# Altium PCB PB2_AdapterBoard_Rev0.PcbDoc
Units mil, origin at the board's own origin, x right, y up, seen from the top; angles counter-clockwise.
Board outline 945.02 x 1811.12 mil, 6 copper layers (Top Layer, Internal Plane 1, Signal Layer 1, Signal Layer 2, Internal Plane 2, Bottom Layer), stack 48.468 mil thick; 8 components, 17 nets, 91 pads, 88 vias.
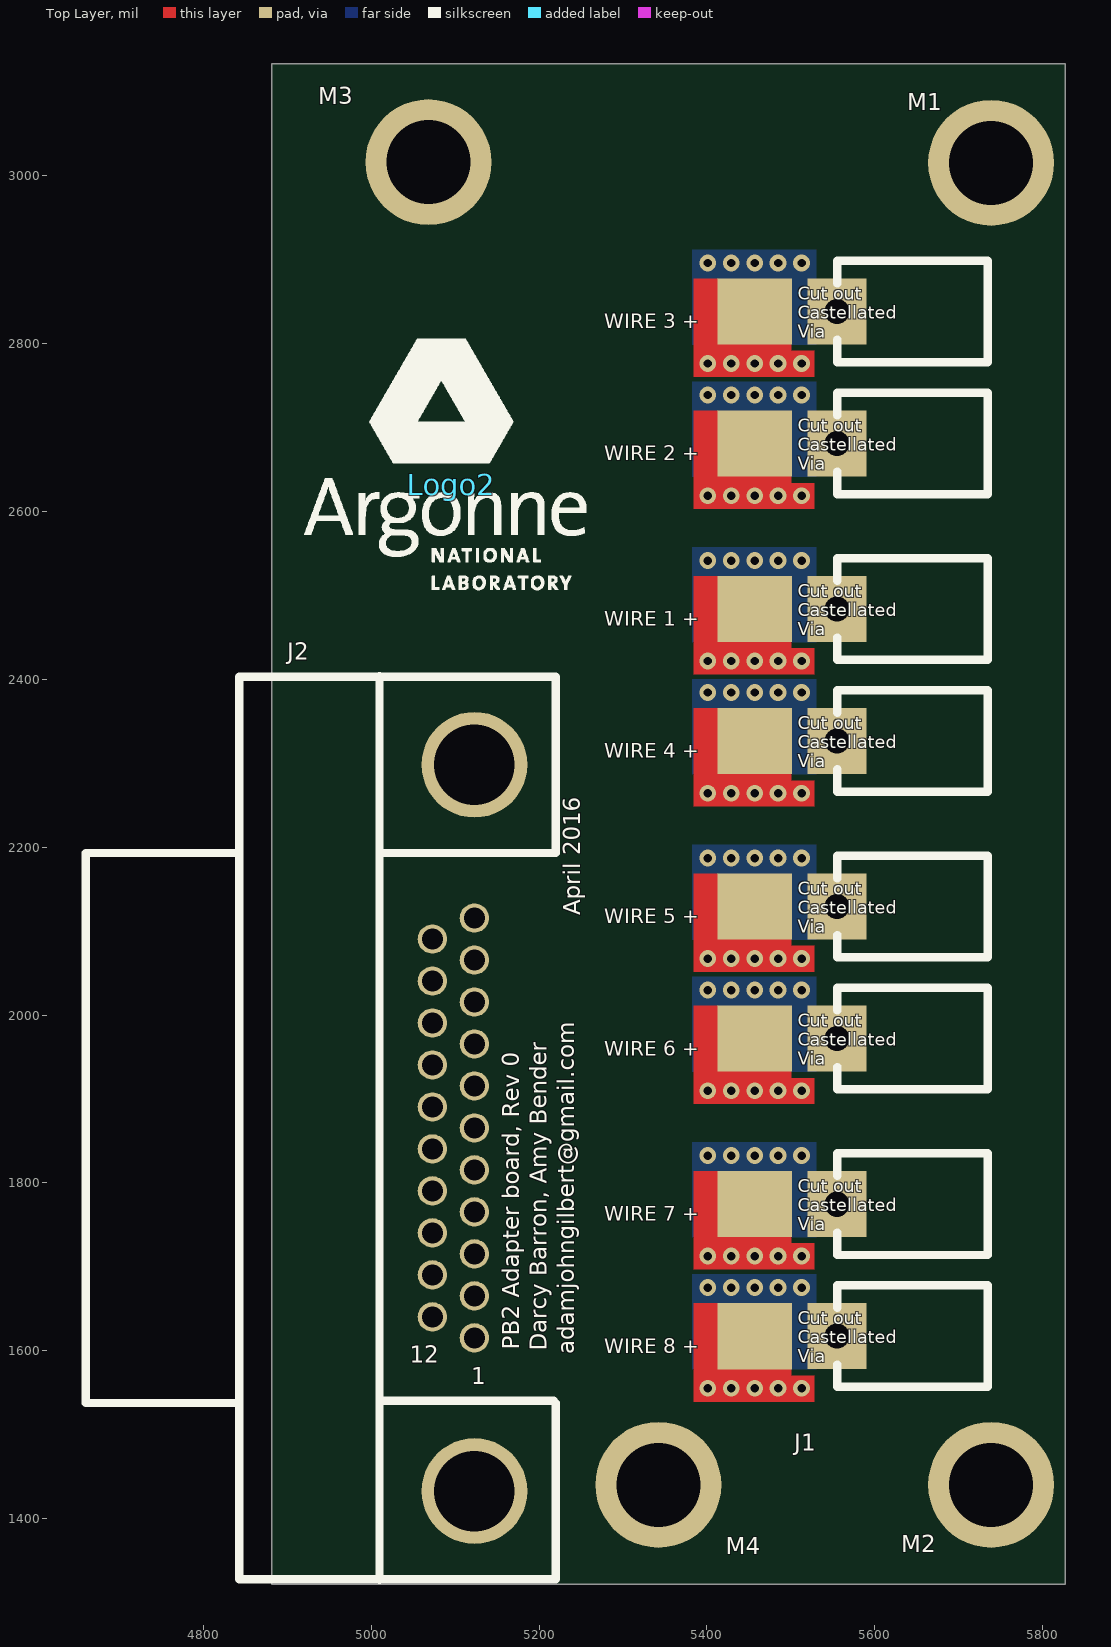
[diagram p0: Top Layer view]
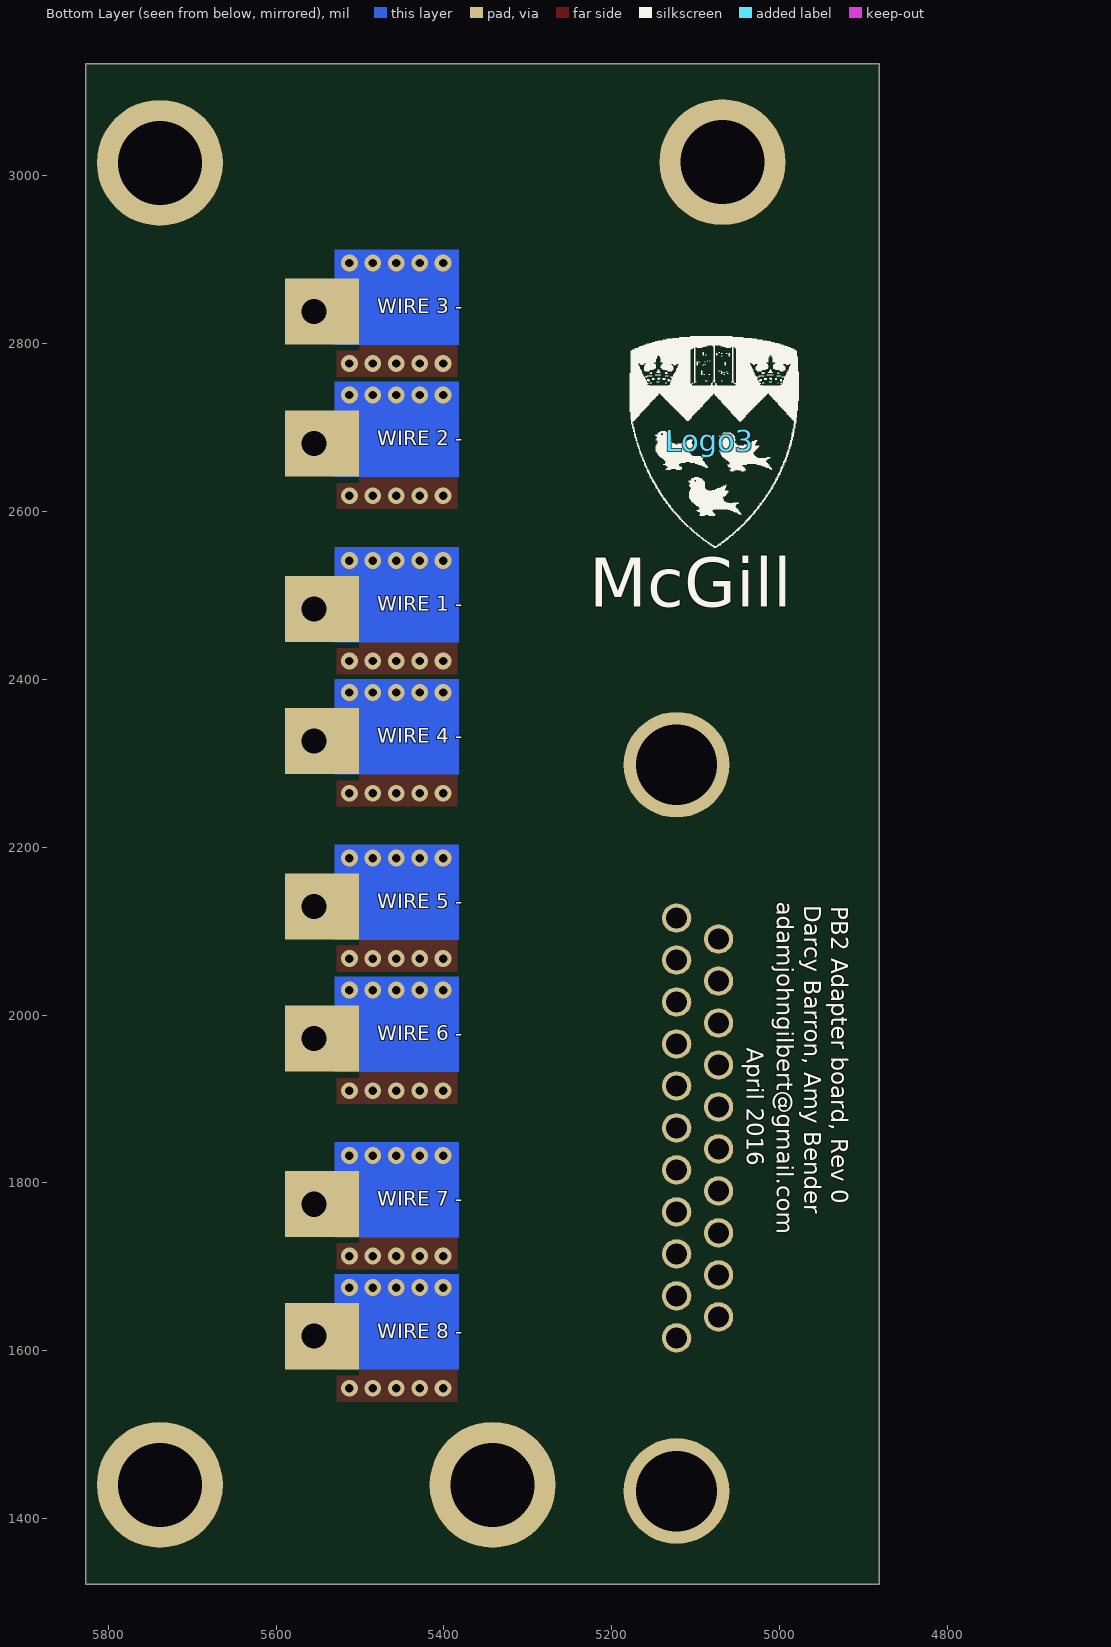
[diagram p1: Bottom Layer view, seen from below]
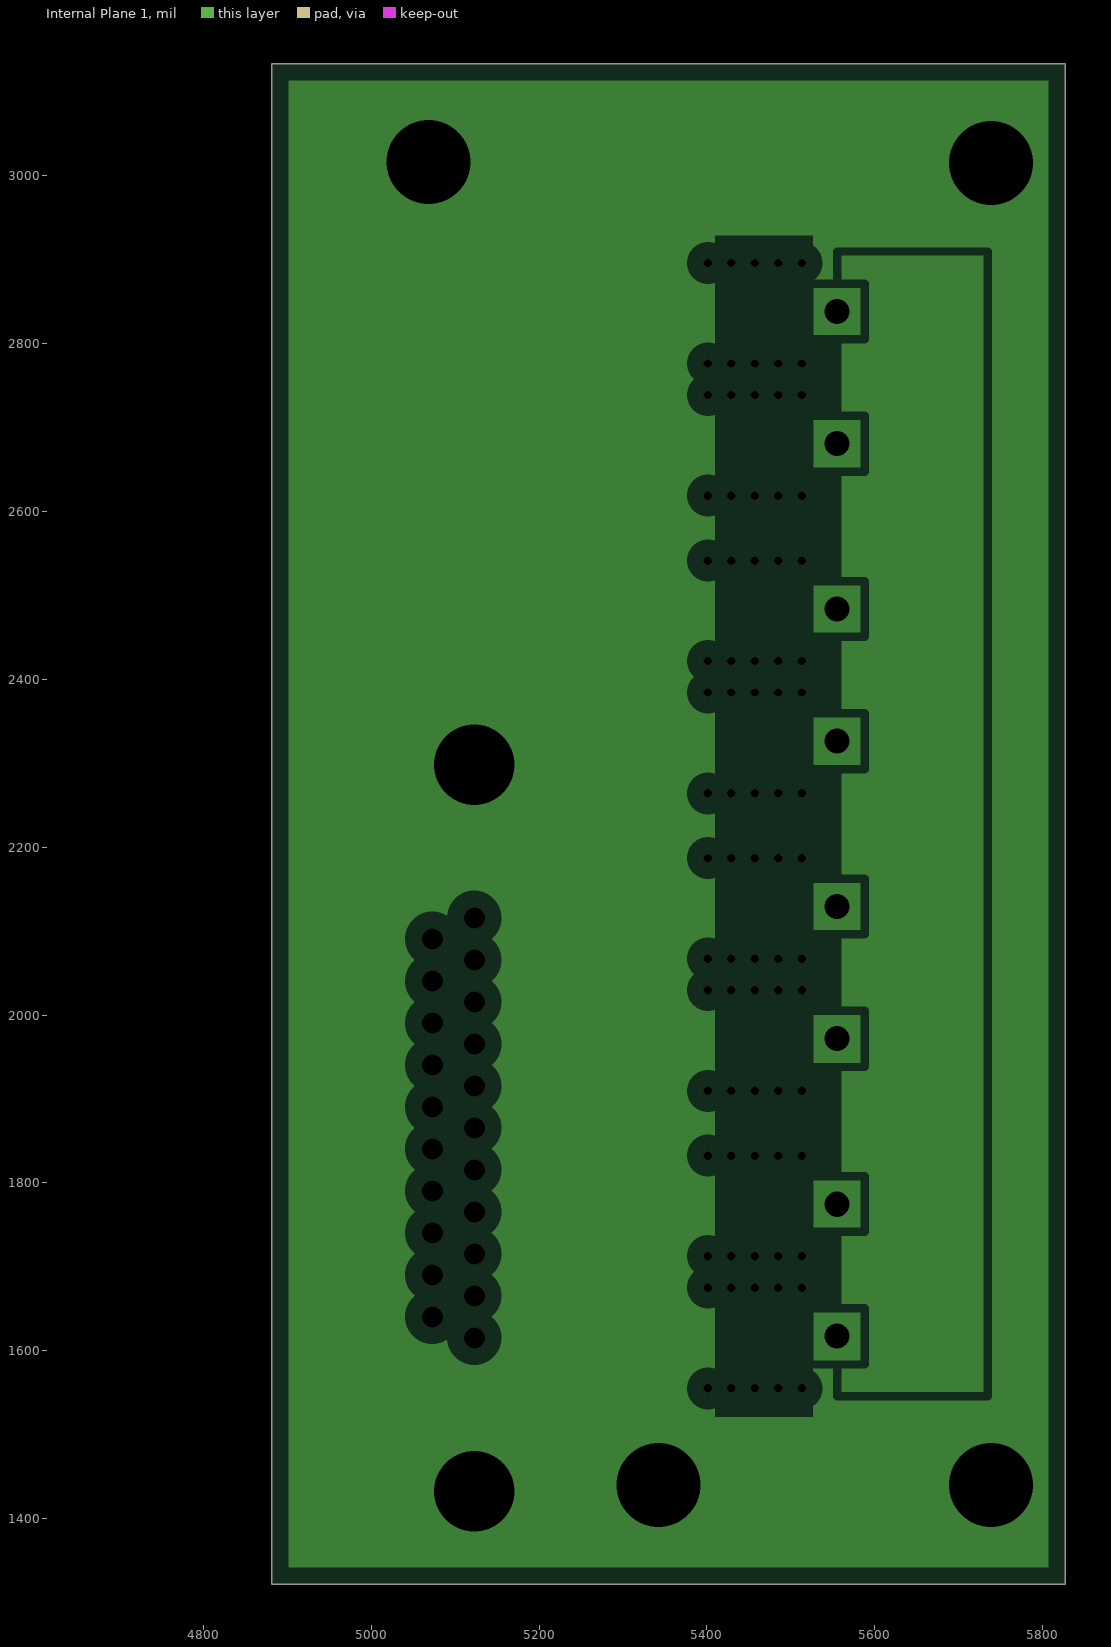
[diagram p2: Internal Plane 1, clearances drawn from the general rule]
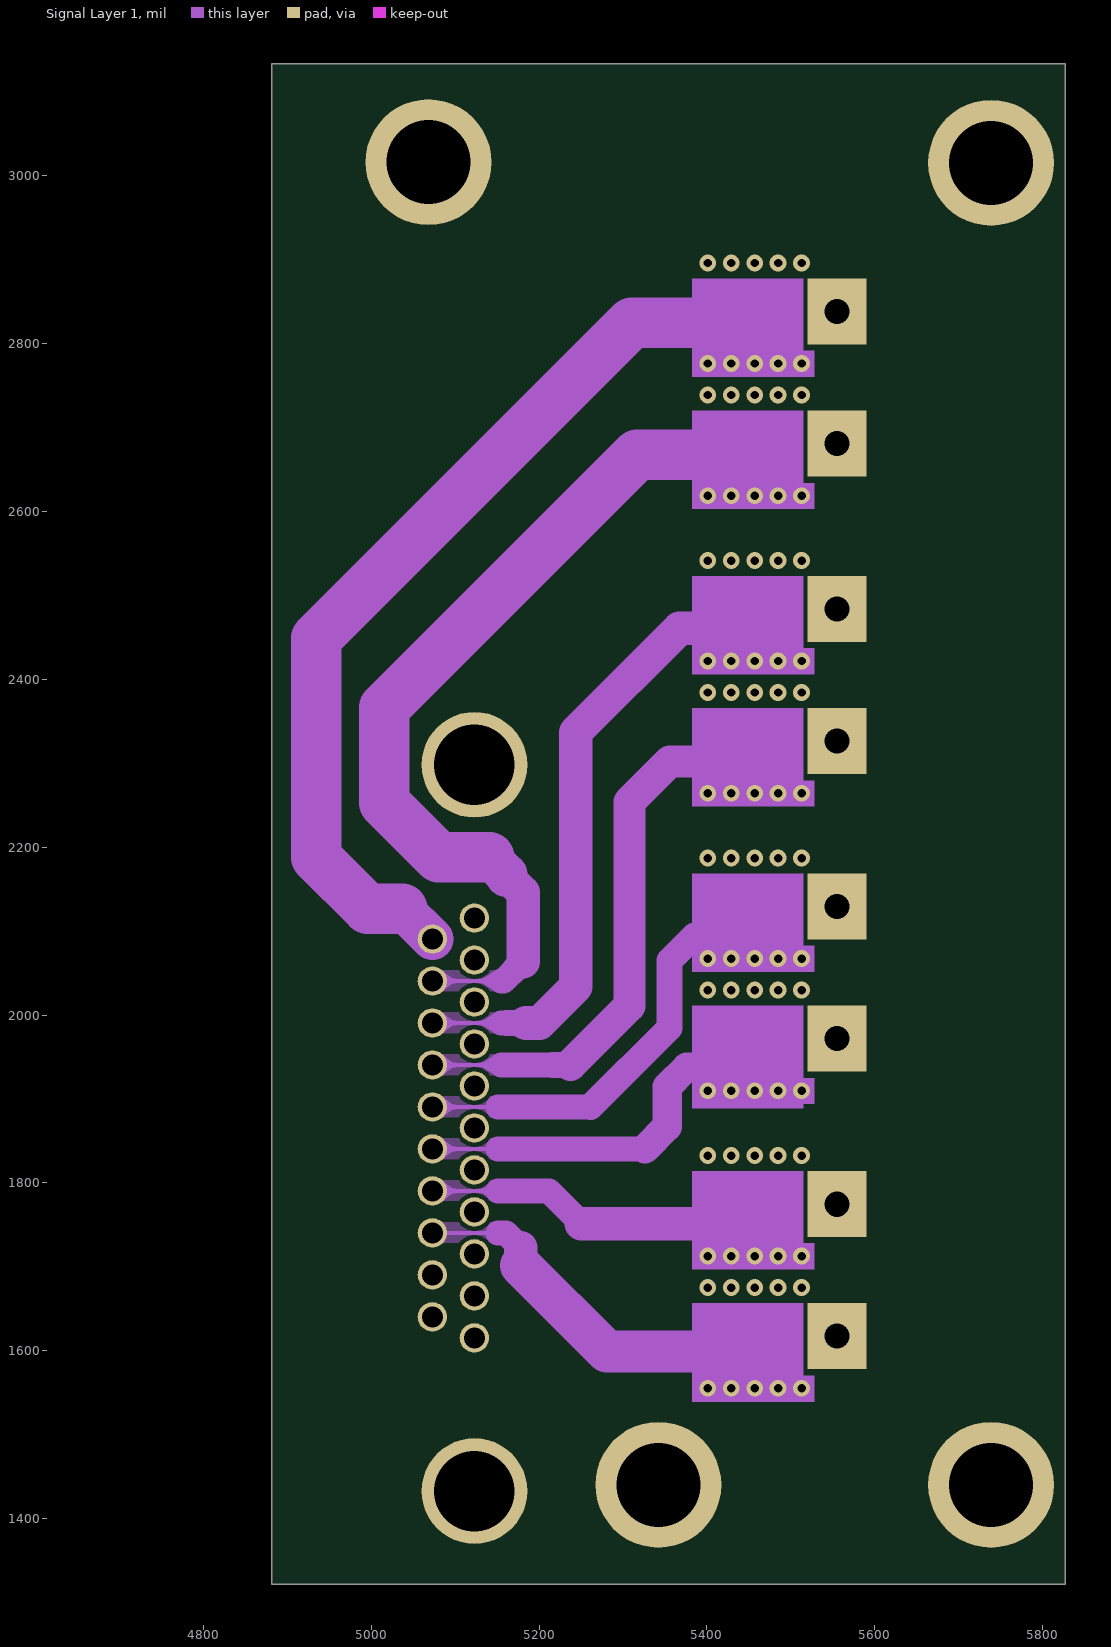
[diagram p3: Signal Layer 1]
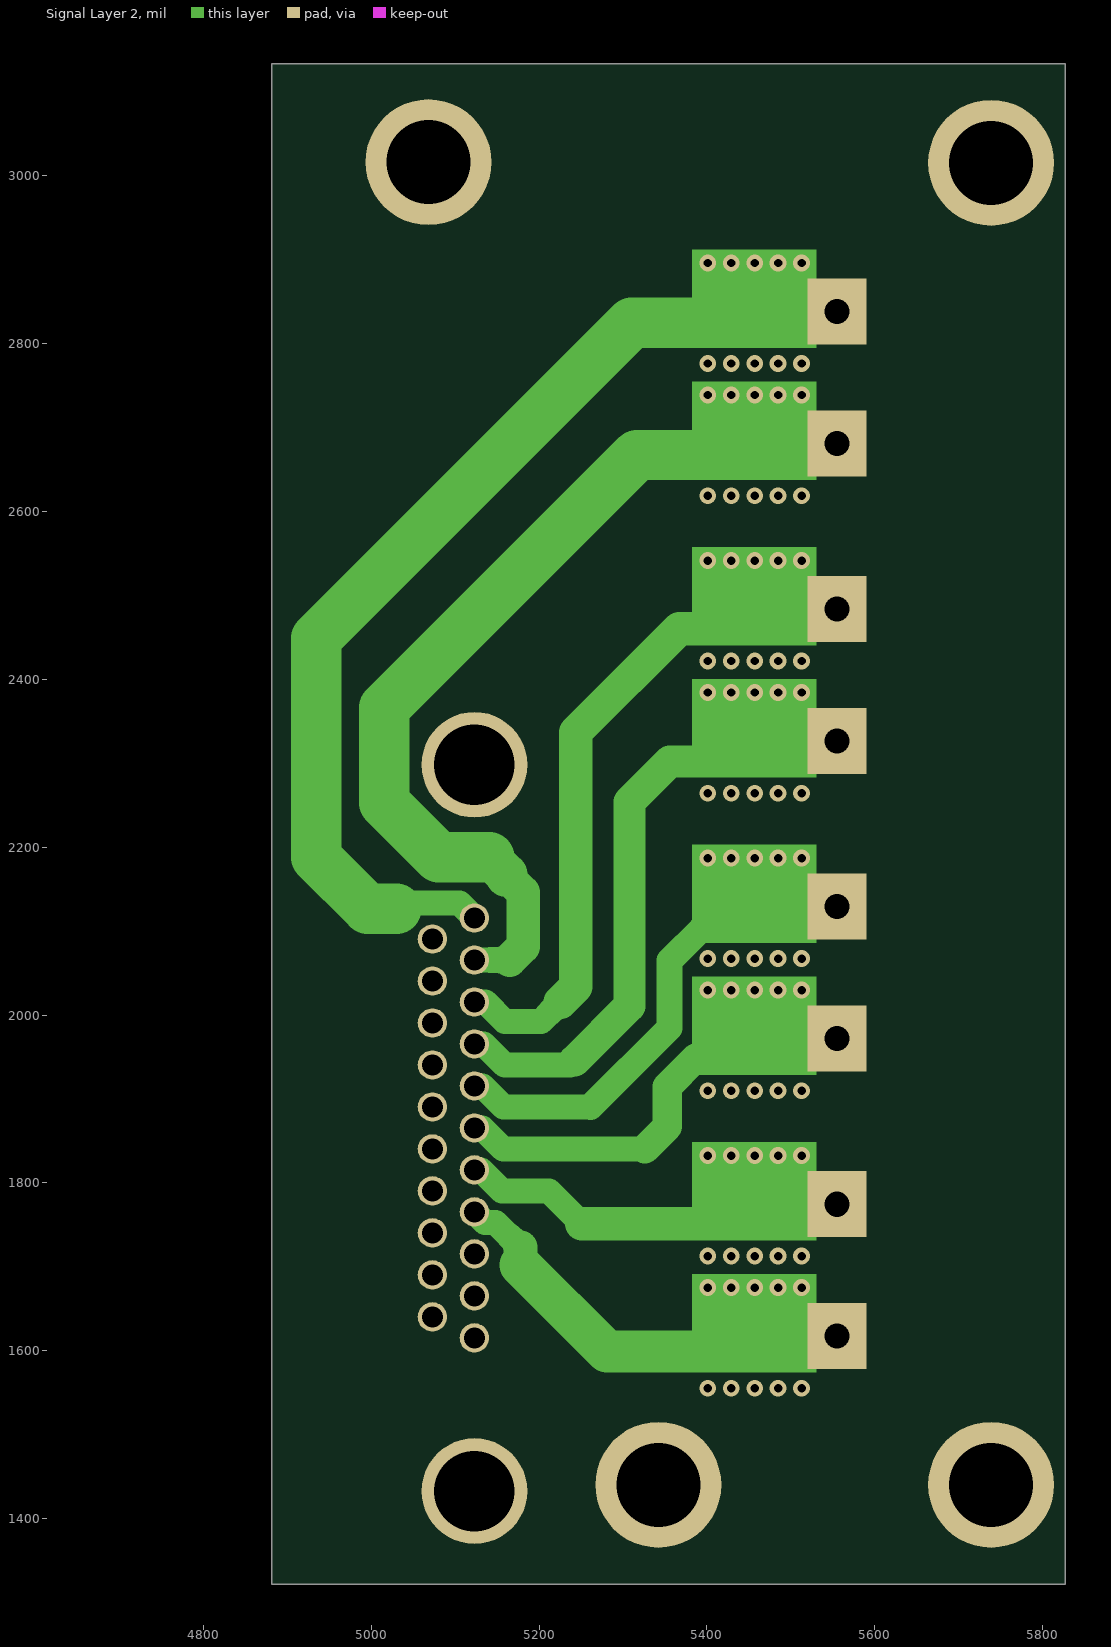
[diagram p4: Signal Layer 2]
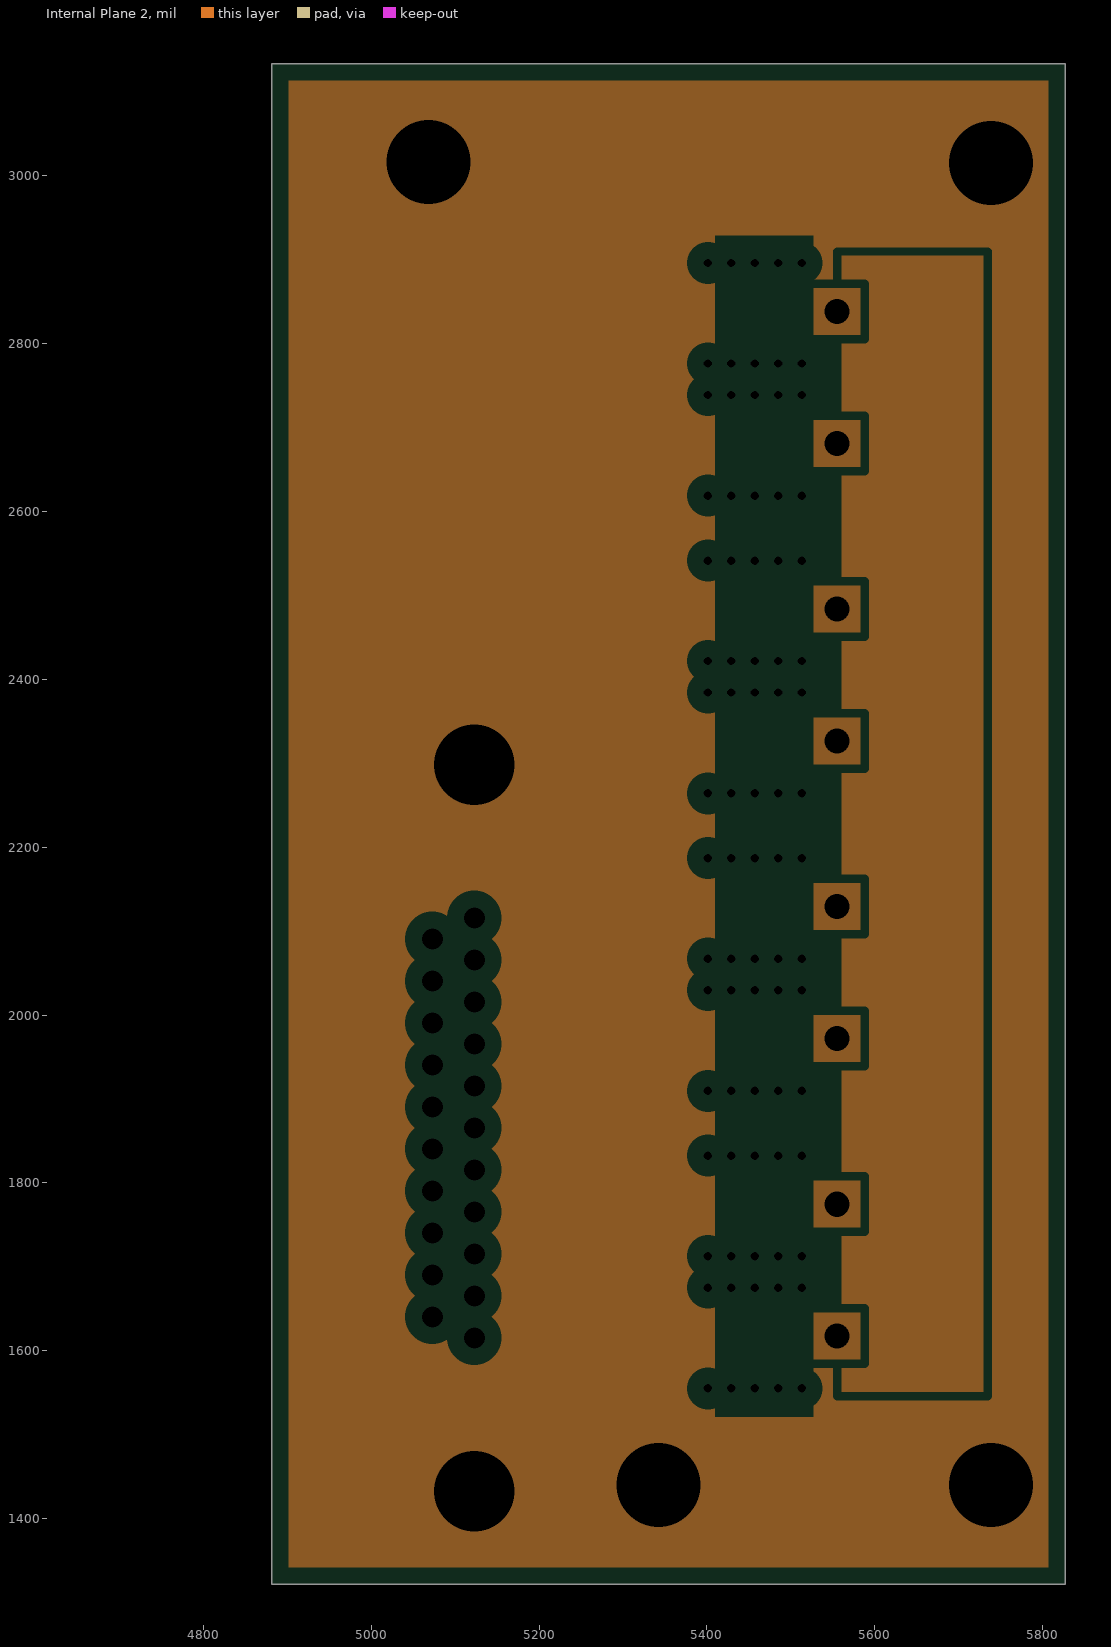
[diagram p5: Internal Plane 2, clearances drawn from the general rule]

## Layer stack, top to bottom
Top Solder: solder mask 0.4, Solder Resist, Dk 3.5
Top Layer: signal copper 1.4
Dielectric 1: core 10, FR-4, Dk 4.2
Internal Plane 1: plane copper 1.417, net GND
Dielectric 4: prepreg 5, Dk 4.2
Signal Layer 1: signal copper 1.417
Dielectric 3: core 10, Dk 4.2
Signal Layer 2: signal copper 1.417
Dielectric 5: prepreg 5, Dk 4.2
Internal Plane 2: plane copper 1.417, net GND
Dielectric 2: core 10, Dk 4.2
Bottom Layer: signal copper 1.4
Bottom Solder: solder mask 0.4, Solder Resist, Dk 3.5

## Board outline
4881.75,1321.95 5826.77,1321.95 5826.77,3133.07 4881.75,3133.07

## Design rules (kind name [scope] priority, off if disabled: settings)
Clearance Clearance_1 [All vs HasFootprint('McGillLogo1')] p1: gap=5
Clearance [All] p2: gap=5
ComponentClearance [(HasFootprint('ArgonneLogo') OR HasFootprint('MCGILLLOGO1'))] p1: gap=0 collisioncheckmode=3 verticalgap=0 showdistances=FALSE
ComponentClearance ComponentClearance_1 [All] p2: gap=10 collisioncheckmode=3 verticalgap=10 showdistances=FALSE
HoleSize [All] p1: absolutevalues=TRUE maxlimit=150 minlimit=1 maxpercent=80.000 minpercent=20.000
MinimumSolderMaskSliver [All] p1: minsoldermaskwidth=3
PlaneClearance [All] p1: clearance=20
PlaneConnect [All] p1: planeconnectstyle=Direct reliefexpansion=20 reliefentries=4 reliefconductorwidth=10 reliefairgap=10
PolygonConnect [All] p1: connectstyle=Direct reliefconductorwidth=10 reliefentries=4 polygonreliefangle="90 Angle" airgapwidth=10
RoutingVias [All] p1: holewidth=28 width=50 viastyle="Through Hole" minholewidth=10 minwidth=20 maxholewidth=28 maxwidth=50
SilkToBoardRegionClearance [All] p1 off:
SilkToSilkClearance [All] p1: silktosilkclearance=5
SolderMaskExpansion [All] p1: expansion=4.5
Width [All] p1: maxlimit=100 minlimit=5 preferedwidth=10 minimp=50.000000 maximp=50.000000 favimp=50.000000
23 further rules are at their usual default settings.

## Components (designator, comment, footprint, x,y, rotation, side; value= is the part's Value field where it differs from the comment)
J1 "Stripline16" STRIPLINE16-HALFLENGTH 5500.97,2129.34 r180 top
J2 "Omnetics MMDS-021-B02-R2" MMDS-021-B02-R2 5122.99,1865.53 r90 top
Logo2 "ArgonneLogo" ArgonneLogo 5095.42,2631.27 r0 top
Logo3 "McGillLogo" McGillLogo1 5083.67,2683.64 r180 bottom
M1 "MountingHole" MountingHole#1 5738.35,3014.96 r0 top
M2 "MountingHole" MountingHole#1 5738.35,1440.57 r0 top
M3 "MountingHole" MountingHole#2 5068.3,3014.96 r0 top
M4 "MountingHole" MountingHole#3 5342.06,1431.03 r0 top

## Footprints (in the part's own frame and the unit in brackets; to place one, negate y for a bottom-side part, rotate by r counter-clockwise, add the part's x,y. Pads: shape width x height; smd on the part's side, far side on the other; paste and mask are expansions set on the pad)
ArgonneLogo [mil]
  silkscreen extent -175,-125 161,174
McGillLogo1 [mil] "McGillLogo"
  silkscreen extent -95,-127 106,124
MMDS-021-B02-R2 [mil] "Omnetrics21pinR2Tail"
  round 35 hole 25: 1(-250,0) 2(-200,0) 3(-150,0) 4(-100,0) 5(-50,0) 6(0,0) 7(50,0) 8(100,0) 9(150,0) 10(200,0) 11(250,0) 12(-225,50) 13(-175,50) 14(-125,50) 15(-75,50) 16(-25,50) 17(25,50) 18(75,50) 19(125,50) 20(175,50) 21(225,50)
  round 125.98 hole 96.06: MH1(-432.5,0) MH2(432.5,0)
  silkscreen extent -538,-97 538,463, body extent -538,-95 537,475, height 320
MountingHole#1 [mil] "Mounting Hole"
  round 150 hole 100: 0(0,0)
MountingHole#2 [mil] "Mounting Hole"
  round 150 hole 100: 0(0,0.69)
MountingHole#3 [mil] "Mounting Hole"
  round 150 hole 100: 0(0,9.54)
STRIPLINE16-HALFLENGTH [mm]
  rect 2.25x2 smd: 1(1.125,13) 3(1.125,9) 5(1.125,4) 7(1.125,0) 9(1.125,-5) 11(1.125,-9) 13(1.125,-14) 15(1.125,-18)
  rect 2.25x2 smd far side: 2(-1.125,13) 4(-1.125,9) 6(-1.125,4) 8(-1.125,0) 10(-1.125,-5) 12(-1.125,-9) 14(-1.125,-14) 16(-1.125,-18)

## Part data
J1: "Stripline16 2mm x 15mm pads"
J2: library part OmneticsMicroD21, "OmneticsMicroD21"
Logo2 Logo3: library part Logo

## Free pads (board coordinates)
  rect 70x78.74 smd paste-50 mask-50: 0(5554.92,1617.59) 0(5554.92,1774.75) 0(5554.92,1971.92) 0(5554.92,2129.08) 0(5554.92,2326.25) 0(5554.92,2483.41) 0(5554.92,2680.58) 0(5554.92,2837.74)
  rect 70x78.74 on Mid2: 0(5554.92,1617.59) 0(5554.92,1774.75) 0(5554.92,1971.92) 0(5554.92,2129.08) 0(5554.92,2326.25) 0(5554.92,2483.41) 0(5554.92,2680.58) 0(5554.92,2837.74)
  rect 70x78.74 on Mid1: 0(5554.92,1617.59) 0(5554.92,1774.75) 0(5554.92,1971.92) 0(5554.92,2129.08) 0(5554.92,2326.25) 0(5554.92,2483.41) 0(5554.92,2680.58) 0(5554.92,2837.74)
  rect 70x78.74 on Top Solder: 0(5554.92,1617.59) 0(5554.92,1774.75) 0(5554.92,1971.92) 0(5554.92,2129.08) 0(5554.92,2326.25) 0(5554.92,2483.41) 0(5554.92,2680.58) 0(5554.92,2837.74)
  round 32 on Top Solder: 2(5401.02,1675.4) 2(5401.02,1832.57) 2(5401.02,2029.74) 2(5401.02,2186.9) 2(5401.02,2384.07) 2(5401.02,2541.23) 2(5401.02,2738.4) 2(5401.02,2895.56) 2(5512.63,1675.4) 2(5512.63,1832.57) 2(5512.63,2029.74) 2(5512.63,2186.9) 2(5512.63,2384.07) 2(5512.63,2541.23) 2(5512.63,2738.4) 2(5512.63,2895.56)

## Via types
v1: diameter 20, hole 10, Top Layer to Bottom Layer, 80 vias
v2: diameter 50, hole 30, Top Layer to Bottom Layer, 8 vias

## Nets (pads, with @x,y where several pads share a name; then routed paths per layer and width w, separated by ;. In a path a pad name is that pad's centre, name@x,y a point inside that pad or via, vN(x,y) a via of type N, cw(c..) or ccw(c..) an arc to the next point about the centre after c; other vN are vias at no path point)
GND: J2.MH1 J2.MH2 M1.0 M2.0 M3.0 M4.0
WIRE_N1: J1.12 J2.9 pad.0@5554.92,2483.41 | length 707.2
  Signal Layer 2 w30: J2.9 5135.99,2015.53 5159.15,1992.36 5202.4,1992.36 5225.57,2015.53
  Signal Layer 2 w40: 5225.57,2015.53 5243.64,2033.6 5243.64,2336.78 5366.76,2459.91 5442.77,2459.91 5447.42,2464.56
  other v1: 5401.02,2541.23 5428.92,2541.23 5456.82,2541.23 5484.73,2541.23 5512.63,2541.23
  other v2: 5554.92,2483.41
WIRE_N2: J1.14 J2.10 pad.0@5554.92,2680.58 | length 980.9
  Signal Layer 2 w30: J2.10 5164.99,2065.53
  Signal Layer 2 w40: 5161.34,2165.76 5181,2146.09 5181,2081.54 5164.99,2065.53
  Signal Layer 2 w50: 5140.78,2187.72 5161.34,2167.16 5161.34,2165.76
  Signal Layer 2 w60: 5140.78,2187.72 5080.73,2187.72 5015.83,2252.62 5015.83,2366.22 5316.58,2666.97 5414.51,2666.97 5417.86,2670.32
  other v1: 5401.02,2738.4 5428.92,2738.4 5456.82,2738.4 5484.73,2738.4 5512.63,2738.4
  other v2: 5554.92,2680.58
WIRE_N3: J1.16 J2.11 pad.0@5554.92,2837.74 | length 1140.5
  Signal Layer 2 w30: 5030.31,2126.61 5039.95,2126.61 5046.65,2133.3 5105.22,2133.3 J2.11
  Signal Layer 2 w60: 5030.31,2126.61 5030.26,2126.56 4995.96,2126.56 4934.49,2188.02 4934.49,2448.56 5310.57,2824.65 5434.54,2824.65
  other v1: 5401.02,2895.56 5428.92,2895.56 5456.82,2895.56 5484.73,2895.56 5512.63,2895.56
  other v2: 5554.92,2837.74
WIRE_N4: J1.10 J2.8 pad.0@5554.92,2326.25 | length 598.9
  Signal Layer 2 w30: J2.8 5133.93,1965.53 5159.06,1940.4 5237.26,1940.4 5242.4,1945.54
  Signal Layer 2 w38: 5242.4,1945.54 5307.54,2010.68 5307.54,2253.83 5355.62,2301.91 5402.64,2301.91 5414.44,2313.71
  other v1: 5401.02,2384.07 5428.92,2384.07 5456.82,2384.07 5484.73,2384.07 5512.63,2384.07
  other v2: 5554.92,2326.25
WIRE_N5: J1.8 J2.7 pad.0@5554.92,2129.08 | length 463.8
  Signal Layer 2 w30: J2.7 5132.5,1915.53 5157.5,1890.53 5261.28,1890.53
  Signal Layer 2 w31: 5261.28,1890.53 5355.59,1984.84 5355.59,2064.96 5393.59,2102.97 5441.54,2102.97
  other v1: 5401.02,2186.9 5428.92,2186.9 5456.82,2186.9 5484.73,2186.9 5512.63,2186.9
  other v2: 5554.92,2129.08
WIRE_N6: J1.6 J2.6 pad.0@5554.92,1971.92 | length 409
  Signal Layer 2 w30: J2.6 5132.27,1865.53 5157.27,1840.53 5326,1840.53
  Signal Layer 2 w35: 5326,1840.53 5352.72,1867.24 5352.72,1914.69 5386.64,1948.61 5449.09,1948.61
  other v1: 5401.02,2029.74 5428.92,2029.74 5456.82,2029.74 5484.73,2029.74 5512.63,2029.74
  other v2: 5554.92,1971.92
WIRE_N7: J1.4 J2.5 pad.0@5554.92,1774.75 | length 355.5
  Signal Layer 2 w30: J2.5 5130.78,1815.53 5155.78,1790.53 5211.76,1790.53 5250.73,1751.55
  Signal Layer 2 w40: 5250.73,1751.55 5436.61,1751.55 5447.48,1762.42
  other v1: 5401.02,1832.57 5428.92,1832.57 5456.82,1832.57 5484.73,1832.57 5512.63,1832.57
  other v2: 5554.92,1774.75
WIRE_N8: J1.2 J2.4 pad.0@5554.92,1617.59 | length 397.9
  Signal Layer 2 w30: J2.4 5135.47,1753.05 5148.06,1753.05 5177.86,1723.25
  Signal Layer 2 w40: 5177.86,1702.1 5177.86,1723.25
  Signal Layer 2 w50: 5177.86,1702.1 5280.82,1599.14 5408.85,1599.14 5430.55,1620.84
  other v1: 5401.02,1675.4 5428.92,1675.4 5456.82,1675.4 5484.73,1675.4 5512.63,1675.4
  other v2: 5554.92,1617.59
WIRE_P1: J1.11 J2.19 | length 709.5
  Signal Layer 1 w5: J2.19 5147,1990.53
  Signal Layer 1 w20: 5147,1990.53 5155,1990.53
  Signal Layer 1 w30: 5155,1990.53 5184,1990.53
  Signal Layer 1 w40: 5184,1990.53 5200.57,1990.53 5243.64,2033.6 5243.64,2336.78 5367.28,2460.42 5410.28,2460.42
  other v1: 5401.02,2421.59 5428.92,2421.59 5456.82,2421.59 5484.73,2421.59 5512.63,2421.59
WIRE_P2: J1.13 J2.20 | length 1042.9
  Signal Layer 1 w5: J2.20 5147,2040.53
  Signal Layer 1 w20: 5147,2040.53 5155,2040.53
  Signal Layer 1 w30: 5155,2040.53 5157.71,2040.53 5180.97,2063.79
  Signal Layer 1 w40: 5161.34,2165.76 5180.97,2146.12 5180.97,2063.79
  Signal Layer 1 w50: 5140.78,2187.72 5161.34,2167.16 5161.34,2165.76
  Signal Layer 1 w60: 5140.78,2187.72 5080.73,2187.72 5015.83,2252.62 5015.83,2366.22 5317.09,2667.48 5410.29,2667.48
  other v1: 5401.02,2618.45 5428.92,2618.45 5456.82,2618.45 5484.73,2618.45 5512.63,2618.45
WIRE_P3: J1.15 J2.21 | length 1069.6
  Signal Layer 1 w50: 5036.96,2126.56 J2.21
  Signal Layer 1 w60: 5036.96,2126.56 4995.96,2126.56 4934.49,2188.02 4934.49,2448.56 5310.57,2824.65 5408.87,2824.65
  other v1: 5401.02,2775.93 5428.92,2775.93 5456.82,2775.93 5484.73,2775.93 5512.63,2775.93
WIRE_P4: J1.9 J2.18 | length 639.1
  Signal Layer 1 w5: J2.18 5147,1940.53
  Signal Layer 1 w20: 5147,1940.53 5155,1940.53
  Signal Layer 1 w30: 5155,1940.53 5237.22,1940.53
  Signal Layer 1 w38: 5237.22,1940.53 5307.54,2010.85 5307.54,2253.82 5355.63,2301.91 5420.09,2301.91
  other v1: 5401.02,2264.11 5428.92,2264.11 5456.82,2264.11 5484.73,2264.11 5512.63,2264.11
WIRE_P5: J1.7 J2.17 | length 469.3
  Signal Layer 1 w5: J2.17 5147,1890.53
  Signal Layer 1 w20: 5147,1890.53 5151.03,1890.53
  Signal Layer 1 w30: 5151.03,1890.53 5261.28,1890.53
  Signal Layer 1 w31: 5261.28,1890.53 5355.59,1984.84 5355.59,2064.96 5385.42,2094.8 5410.74,2094.8
  other v1: 5401.02,2067.26 5428.92,2067.26 5456.82,2067.26 5484.73,2067.26 5512.63,2067.26
WIRE_P6: J1.5 J2.16 | length 406.8
  Signal Layer 1 w5: J2.16 5147,1840.53
  Signal Layer 1 w20: 5147,1840.53 5151.03,1840.53
  Signal Layer 1 w30: 5151.03,1840.53 5326,1840.53
  Signal Layer 1 w35: 5326,1840.53 5352.49,1867.02 5352.49,1914.47 5375.89,1937.86 5411.66,1937.86
  other v1: 5401.02,1909.78 5428.92,1909.78 5456.82,1909.78 5484.73,1909.78 5512.63,1909.78
WIRE_P7: J1.3 J2.15 | length 352
  Signal Layer 1 w5: J2.15 5147,1790.53
  Signal Layer 1 w20: 5147,1790.53 5151.03,1790.53
  Signal Layer 1 w30: 5151.03,1790.53 5211.76,1790.53 5250.61,1751.68
  Signal Layer 1 w40: 5250.61,1751.68 5408.91,1751.68
  other v1: 5401.02,1712.93 5428.92,1712.93 5456.82,1712.93 5484.73,1712.93 5512.63,1712.93
WIRE_P8: J1.1 J2.14 | length 408.7
  Signal Layer 1 w5: J2.14 5147,1740.53
  Signal Layer 1 w20: 5147,1740.53 5151.03,1740.53
  Signal Layer 1 w30: 5151.03,1740.53 5160.59,1740.53 5178.44,1722.68
  Signal Layer 1 w40: 5178.44,1701.53 5178.44,1722.68
  Signal Layer 1 w50: 5178.44,1701.53 5280.73,1599.23 5410.74,1599.23
  other v1: 5401.02,1555.45 5428.92,1555.45 5456.82,1555.45 5484.73,1555.45 5512.63,1555.45
pads on no net: J2.1 J2.2 J2.3 J2.12 J2.13

## Polygon pours and split planes (outlines as drawn)
WIRE_P4 on Signal Layer 1 "Top Layer-No Net" (solid, pour order 210): 5145.94,1928.4 5145.78,1928.55 5091.35,1928.55 5084.97,1928.55 5072.99,1940.53 5085.56,1953.1 5133.13,1953.1 5145.94,1953.1
WIRE_P1 on Signal Layer 1 "Top Layer-No Net" (solid, pour order 208): 5145.94,1978.4 5145.78,1978.55 5091.35,1978.55 5084.97,1978.55 5072.99,1990.53 5085.56,2003.1 5133.13,2003.1 5145.94,2003.1
WIRE_P2 on Signal Layer 1 "Top Layer-No Net" (solid, pour order 206): 5145.94,2028.4 5145.78,2028.55 5091.35,2028.55 5084.97,2028.55 5072.99,2040.53 5085.56,2053.1 5133.13,2053.1 5145.94,2053.1
WIRE_P7 on Signal Layer 1 "Top Layer-No Net" (solid, pour order 204): 5145.94,1778.4 5145.78,1778.55 5091.35,1778.55 5084.97,1778.55 5072.99,1790.53 5085.56,1803.1 5133.13,1803.1 5145.94,1803.1
WIRE_P6 on Signal Layer 1 "Top Layer-No Net" (solid, pour order 202): 5145.94,1828.4 5145.78,1828.55 5091.35,1828.55 5084.97,1828.55 5072.99,1840.53 5085.56,1853.1 5133.13,1853.1 5145.94,1853.1
WIRE_P5 on Signal Layer 1 "Top Layer-No Net" (solid, pour order 200): 5145.94,1878.4 5145.78,1878.55 5091.35,1878.55 5084.97,1878.55 5072.99,1890.53 5085.56,1903.1 5133.13,1903.1 5145.94,1903.1
WIRE_P8 on Signal Layer 1 "Top Layer-No Net" (solid, pour order 198): 5145.94,1728.4 5145.78,1728.55 5091.35,1728.55 5084.97,1728.55 5072.99,1740.53 5085.56,1753.1 5133.13,1753.1 5145.94,1753.1
WIRE_N4 on Internal Plane 1 (split plane): 5582.97,2297.59 5527.17,2297.59 5527.17,2354.39 5582.97,2354.39
WIRE_N6 on Internal Plane 1 (split plane): 5582.97,1943.26 5527.17,1943.26 5527.17,2000.06 5582.97,2000.06
WIRE_N2 on Internal Plane 1 (split plane): 5582.97,2651.92 5527.17,2651.92 5527.17,2708.72 5582.97,2708.72
GND on Internal Plane 1 (split plane): 5729.39,2554.96 5729.39,2200.63 5729.39,1900.57 5729.39,1551.34 5560.02,1551.34 5560.02,1578.73 5588.07,1578.73 5590.02,1579.12 5591.67,1580.22 5592.78,1581.88 5593.17,1583.83 5593.17,1650.83 5592.78,1652.78 5591.67,1654.43 5590.02,1655.54 5588.07,1655.92 5560.02,1655.92 5560.02,1736.73 5588.07,1736.73 5590.02,1737.12 5591.67,1738.22 5592.78,1739.88 5593.17,1741.83 5593.17,1807.83 5592.78,1809.78 5591.67,1811.43 5590.02,1812.54 5588.07,1812.92 5560.02,1812.92 5560.02,1898.8 5560.37,1900.57 5560.02,1902.34 5560.02,1933.06 5588.07,1933.06 5590.02,1933.45 5591.67,1934.55 5592.78,1936.21 5593.17,1938.16 5593.17,2005.16 5592.78,2007.11 5591.67,2008.76 5590.02,2009.87 5588.07,2010.26 5560.02,2010.26 5560.02,2091.06 5588.07,2091.06 5590.02,2091.45 5591.67,2092.55 5592.78,2094.21 5593.17,2096.16 5593.17,2162.16 5592.78,2164.11 5591.67,2165.76 5590.02,2166.87 5588.07,2167.26 5560.02,2167.26 5560.02,2253.13 5560.37,2254.9 5560.02,2256.67 5560.02,2287.39 5588.07,2287.39 5590.02,2287.78 5591.67,2288.88 5592.78,2290.54 5593.17,2292.49 5593.17,2359.49 5592.78,2361.44 5591.67,2363.09 5590.02,2364.2 5588.07,2364.59 5560.02,2364.59 5560.02,2445.39 5588.07,2445.39 5590.02,2445.78 5591.67,2446.88 5592.78,2448.54 5593.17,2450.49 5593.17,2516.49 5592.78,2518.44 5591.67,2520.09 5590.02,2521.2 5588.07,2521.59 5560.02,2521.59 5560.02,2641.72 5588.07,2641.72 5590.02,2642.11 5591.67,2643.21 5592.78,2644.87 5593.17,2646.82 5593.17,2713.82 5592.78,2715.77 5591.67,2717.42 5590.02,2718.53 5588.07,2718.92 5560.02,2718.92 5560.02,2799.72 5588.07,2799.72 5590.02,2800.11 5591.67,2801.21 5592.78,2802.87 5593.17,2804.82 5593.17,2870.82 5592.78,2872.77 5591.67,2874.42 5590.02,2875.53 5588.07,2875.92 5560.02,2875.92 5560.02,2904.19 5729.39,2904.19
WIRE_N8 on Internal Plane 1 (split plane): 5582.97,1588.92 5527.17,1588.92 5527.17,1645.73 5582.97,1645.73
WIRE_N1 on Internal Plane 1 (split plane): 5582.97,2455.59 5527.17,2455.59 5527.17,2511.39 5582.97,2511.39
WIRE_N5 on Internal Plane 1 (split plane): 5582.97,2101.26 5527.17,2101.26 5527.17,2157.06 5582.97,2157.06
WIRE_N3 on Internal Plane 1 (split plane): 5582.97,2809.92 5527.17,2809.92 5527.17,2865.72 5582.97,2865.72
GND on Internal Plane 1 (split plane): 5806.67,1342.05 4901.84,1342.05 4901.84,3112.97 5806.67,3112.97
WIRE_N7 on Internal Plane 1 (split plane): 5582.97,1746.92 5527.17,1746.92 5527.17,1802.73 5582.97,1802.73
WIRE_N2 on Internal Plane 2 (split plane): 5582.97,2652.75 5527.17,2652.75 5527.17,2708.56 5582.97,2708.56
WIRE_N1 on Internal Plane 2 (split plane): 5582.97,2455.59 5527.17,2455.59 5527.17,2511.39 5582.97,2511.39
WIRE_N3 on Internal Plane 2 (split plane): 5582.97,2809.92 5527.17,2809.92 5527.17,2865.72 5582.97,2865.72
GND on Internal Plane 2 (split plane): 5729.39,2554.96 5729.39,2200.63 5729.39,1900.57 5729.39,1551.34 5560.02,1551.34 5560.02,1579.56 5588.07,1579.56 5590.02,1579.95 5591.67,1581.06 5592.78,1582.71 5593.17,1584.66 5593.17,1650.66 5592.78,1652.61 5591.67,1654.27 5590.02,1655.37 5588.07,1655.76 5560.02,1655.76 5560.02,1736.73 5588.07,1736.73 5590.02,1737.12 5591.67,1738.22 5592.78,1739.88 5593.17,1741.83 5593.17,1807.83 5592.78,1809.78 5591.67,1811.43 5590.02,1812.54 5588.07,1812.92 5560.02,1812.92 5560.02,1900.93 5560.02,1933.89 5588.07,1933.89 5590.02,1934.28 5591.67,1935.39 5592.78,1937.04 5593.17,1938.99 5593.17,2004.99 5592.78,2006.94 5591.67,2008.6 5590.02,2009.7 5588.07,2010.09 5560.02,2010.09 5560.02,2091.06 5588.07,2091.06 5590.02,2091.45 5591.67,2092.55 5592.78,2094.21 5593.17,2096.16 5593.17,2162.16 5592.78,2164.11 5591.67,2165.76 5590.02,2166.87 5588.07,2167.26 5560.02,2167.26 5560.02,2255.26 5560.02,2288.23 5588.07,2288.23 5590.02,2288.61 5591.67,2289.72 5592.78,2291.37 5593.17,2293.32 5593.17,2359.32 5592.78,2361.27 5591.67,2362.93 5590.02,2364.03 5588.07,2364.42 5560.02,2364.42 5560.02,2445.39 5588.07,2445.39 5590.02,2445.78 5591.67,2446.88 5592.78,2448.54 5593.17,2450.49 5593.17,2516.49 5592.78,2518.44 5591.67,2520.09 5590.02,2521.2 5588.07,2521.59 5560.02,2521.59 5560.02,2609.59 5560.02,2642.56 5588.07,2642.56 5590.02,2642.94 5591.67,2644.05 5592.78,2645.7 5593.17,2647.65 5593.17,2713.65 5592.78,2715.61 5591.67,2717.26 5590.02,2718.36 5588.07,2718.75 5560.02,2718.75 5560.02,2799.72 5588.07,2799.72 5590.02,2800.11 5591.67,2801.21 5592.78,2802.87 5593.17,2804.82 5593.17,2870.82 5592.78,2872.77 5591.67,2874.42 5590.02,2875.53 5588.07,2875.92 5560.02,2875.92 5560.02,2904.19 5729.39,2904.19
WIRE_N4 on Internal Plane 2 (split plane): 5582.97,2298.42 5527.17,2298.42 5527.17,2354.23 5582.97,2354.23
WIRE_N6 on Internal Plane 2 (split plane): 5582.97,1944.09 5527.17,1944.09 5527.17,1999.89 5582.97,1999.89
WIRE_N7 on Internal Plane 2 (split plane): 5582.97,1746.92 5527.17,1746.92 5527.17,1802.73 5582.97,1802.73
WIRE_N5 on Internal Plane 2 (split plane): 5582.97,2101.26 5527.17,2101.26 5527.17,2157.06 5582.97,2157.06
GND on Internal Plane 2 (split plane): 5806.67,1342.05 4901.84,1342.05 4901.84,3112.97 5806.67,3112.97
WIRE_N8 on Internal Plane 2 (split plane): 5582.97,1589.76 5527.17,1589.76 5527.17,1645.56 5582.97,1645.56

## Other copper
Top Layer:
  region net WIRE_P2: 5500.91,2643.85 5412.74,2643.85 5412.74,2602.45 5500.91,2602.45
  region net WIRE_P1: 5500.91,2447 5412.74,2447 5412.74,2405.59 5500.91,2405.59
  region net WIRE_P4: 5500.91,2289.52 5412.74,2289.52 5412.74,2248.11 5500.91,2248.11
  region net WIRE_P5: 5500.91,2092.67 5412.74,2092.67 5412.74,2051.26 5500.91,2051.26
  region net WIRE_P6: 5500.91,1935.19 5412.74,1935.19 5412.74,1893.78 5500.91,1893.78
  region net WIRE_P7: 5500.91,1738.34 5412.74,1738.34 5412.74,1696.93 5500.91,1696.93
  region net WIRE_P8: 5500.91,1580.86 5412.74,1580.86 5412.74,1539.45 5500.91,1539.45
  region net WIRE_P3: 5500.91,2801.33 5412.74,2801.33 5412.74,2759.93 5500.91,2759.93
  rectangle net WIRE_P3: 5383.98,2759.93 5412.74,2794.58
  region net WIRE_P3: 5527.87,2791.27 5500.91,2791.27 5500.91,2759.93 5527.87,2759.93
  region net WIRE_P2: 5527.87,2633.79 5500.91,2633.79 5500.91,2602.45 5527.87,2602.45
  rectangle net WIRE_P2: 5383.98,2602.45 5412.74,2637.1
  region net WIRE_P1: 5527.87,2436.94 5500.91,2436.94 5500.91,2405.59 5527.87,2405.59
  rectangle net WIRE_P1: 5383.98,2405.59 5412.74,2440.25
  rectangle net WIRE_P4: 5383.98,2248.11 5412.74,2282.77
  region net WIRE_P5: 5527.87,2082.61 5500.91,2082.61 5500.91,2051.26 5527.87,2051.26
  rectangle net WIRE_P5: 5383.98,2051.26 5412.74,2085.92
  rectangle net WIRE_P6: 5383.98,1893.78 5412.74,1928.44
  region net WIRE_P7: 5527.87,1728.28 5500.91,1728.28 5500.91,1696.93 5527.87,1696.93
  rectangle net WIRE_P7: 5383.98,1696.93 5412.74,1731.59
  region net WIRE_P8: 5527.87,1570.8 5500.91,1570.8 5500.91,1539.45 5527.87,1539.45
  rectangle net WIRE_P8: 5383.98,1539.45 5412.74,1574.11
  region net WIRE_P6: 5527.87,1925.13 5500.91,1925.13 5500.91,1893.78 5527.87,1893.78
  region net WIRE_P4: 5527.87,2279.46 5500.91,2279.46 5500.91,2248.11 5527.87,2248.11
  rectangle net WIRE_P2: 5383.98,2632.52 5413.9,2719.93
  rectangle net WIRE_P3: 5383.98,2789.68 5413.9,2877.09
  rectangle net WIRE_P1: 5383.98,2435.35 5413.9,2522.76
  rectangle net WIRE_P4: 5383.98,2278.19 5413.9,2365.6
  rectangle net WIRE_P5: 5383.98,2081.02 5413.9,2168.43
  rectangle net WIRE_P6: 5383.98,1923.86 5413.9,2011.27
  rectangle net WIRE_P7: 5383.98,1726.69 5413.9,1814.1
  rectangle net WIRE_P8: 5383.98,1569.53 5413.9,1656.94
  text "Top" at 5882.06,2861.9 h20
Signal Layer 1:
  region net WIRE_P3: 5527.87,2791.27 5500.91,2791.27 5500.91,2759.93 5527.87,2759.93
  region net WIRE_P4: 5527.87,2279.46 5500.91,2279.46 5500.91,2248.11 5527.87,2248.11
  region net WIRE_P8: 5527.87,1570.8 5500.91,1570.8 5500.91,1539.45 5527.87,1539.45
  region net WIRE_P7: 5527.87,1728.28 5500.91,1728.28 5500.91,1696.93 5527.87,1696.93
  region net WIRE_P6: 5527.87,1925.13 5500.91,1925.13 5500.91,1893.78 5527.87,1893.78
  region net WIRE_P5: 5527.87,2082.61 5500.91,2082.61 5500.91,2051.26 5527.87,2051.26
  region net WIRE_P1: 5527.87,2436.94 5500.91,2436.94 5500.91,2405.59 5527.87,2405.59
  region net WIRE_P2: 5527.87,2633.79 5500.91,2633.79 5500.91,2602.45 5527.87,2602.45
  rectangle net WIRE_P1: 5382.22,2405.59 5514.75,2522.63
  rectangle net WIRE_P4: 5382.22,2248.11 5514.75,2365.5
  rectangle net WIRE_P5: 5382.22,2051.26 5514.75,2168.34
  rectangle net WIRE_P6: 5382.24,1888.61 5514.76,2011.35
  rectangle net WIRE_P7: 5382.22,1696.93 5514.75,1814.05
  rectangle net WIRE_P8: 5382.22,1539.45 5514.75,1656.91
  rectangle net WIRE_P2: 5382.22,2602.45 5514.75,2719.79
  rectangle net WIRE_P3: 5382.22,2759.93 5514.75,2877.12
  text "Mid1" at 5882.63,2791.36 h20
Signal Layer 2:
  region net WIRE_N3: 5530.51,2911.56 5381.99,2911.56 5381.99,2794.24 5530.51,2794.24
  rectangle net WIRE_N3: 5500.91,2794.24 5520.27,2877.01
  region net WIRE_N2: 5530.51,2754.4 5381.99,2754.4 5381.99,2637.07 5530.51,2637.07
  region net WIRE_N1: 5530.51,2557.23 5381.99,2557.23 5381.99,2439.91 5530.51,2439.91
  region net WIRE_N4: 5530.51,2400.07 5381.99,2400.07 5381.99,2282.74 5530.51,2282.74
  region net WIRE_N5: 5530.51,2202.9 5381.99,2202.9 5381.99,2085.58 5530.51,2085.58
  region net WIRE_N6: 5530.51,2045.74 5381.99,2045.74 5381.99,1928.41 5530.51,1928.41
  region net WIRE_N7: 5530.51,1848.57 5381.99,1848.57 5381.99,1731.25 5530.51,1731.25
  region net WIRE_N8: 5530.51,1691.4 5381.99,1691.4 5381.99,1574.08 5530.51,1574.08
  text "Mid2" at 5880.63,2756.36 h20
Bottom Layer:
  rectangle net WIRE_N3: 5382.2,2797.85 5530.57,2911.56
  rectangle net WIRE_N2: 5382.2,2640.69 5530.57,2754.4
  rectangle net WIRE_N1: 5382.2,2443.52 5530.57,2557.23
  rectangle net WIRE_N4: 5382.2,2286.36 5530.57,2400.07
  rectangle net WIRE_N5: 5382.2,2089.19 5530.57,2202.9
  rectangle net WIRE_N6: 5382.2,1932.02 5530.57,2045.74
  rectangle net WIRE_N7: 5382.2,1734.86 5530.57,1848.57
  rectangle net WIRE_N8: 5382.2,1577.69 5530.57,1691.4
  text "Bot" at 5884.6,2679.5 h20
Internal Plane 1 (plane layer: these items are gaps in the copper):
  rectangle: 5409.55,1521.47 5526.03,2928.27
  rectangle: 5526.03,2717.29 5551.48,2800.81
  rectangle: 5526.03,2518.09 5551.3,2642.56
  rectangle: 5526.03,2163.75 5551.48,2288.23
  rectangle: 5526.03,2362.73 5551.48,2446.25
  rectangle: 5526.03,1809.42 5551.48,1933.89
  rectangle: 5526.03,2008.48 5551.13,2093.13
  rectangle: 5526.03,1654.15 5550.95,1738.8
  lines w10: 5554.92,1583.83 5554.92,1546.59 5555.27,1546.24 5734.49,1546.24 5734.49,1900.57 5734.49,2200.63 5734.49,2554.96 5734.49,2909.29 5554.92,2909.28 5554.92,2870.82 ; 5554.92,1650.83 5554.92,1740.53 ; 5554.92,1807.83 5554.92,1900.57 ; 5554.92,1938.16 5554.92,1900.93 5555.27,1900.57 ; 5554.92,2005.16 5554.92,2094.86 ; 5554.92,2162.16 5554.92,2255.26 ; 5554.92,2292.49 5554.92,2255.26 ; 5554.92,2359.49 5554.92,2449.19 ; 5554.92,2516.49 5554.92,2646.82 ; 5554.92,2713.82 5554.92,2803.52 ; 5555.27,2254.9 5554.92,2255.26 ; 5522.07,1583.83 5588.07,1583.83 5588.07,1650.83 5522.07,1650.83 5522.07,1583.83 ; 5522.07,1741.83 5588.07,1741.83 5588.07,1807.83 5522.07,1807.83 5522.07,1741.83 ; 5522.07,1938.16 5588.07,1938.16 5588.07,2005.16 5522.07,2005.16 5522.07,1938.16 ; 5522.07,2096.16 5588.07,2096.16 5588.07,2162.16 5522.07,2162.16 5522.07,2096.16 ; 5522.07,2292.49 5588.07,2292.49 5588.07,2359.49 5522.07,2359.49 5522.07,2292.49 ; 5522.07,2450.49 5588.07,2450.49 5588.07,2516.49 5522.07,2516.49 5522.07,2450.49 ; 5522.07,2646.82 5522.07,2713.82 5588.07,2713.82 5588.07,2646.82 5522.07,2646.82 ; 5522.07,2804.82 5522.07,2870.82 5588.07,2870.82 5588.07,2804.82 5522.07,2804.82
  text "Ground plane 1" at 5878.78,2824.77 h20
Internal Plane 2 (plane layer: these items are gaps in the copper):
  rectangle: 5409.55,1521.47 5526.28,2928.27
  rectangle: 5526.28,2717.85 5551.21,2800.67
  rectangle: 5526.28,2520.92 5551.23,2643.61
  rectangle: 5526.28,2363.92 5550.79,2446.37
  rectangle: 5526.28,2167.26 5550.79,2289.26
  rectangle: 5526.28,2009.35 5551.34,2092.02
  rectangle: 5526.28,1810.9 5551.5,1934.58
  rectangle: 5526.28,1654.89 5550.57,1736.73
  lines w10: 5554.92,1546.59 5554.92,1583.83 ; 5554.92,1650.83 5554.92,1740.53 ; 5554.92,1808.83 5554.92,1900.93 5554.92,1938.16 ; 5554.92,2005.16 5554.92,2094.86 ; 5554.92,2163.16 5554.92,2255.26 5554.92,2292.49 ; 5554.92,2359.49 5554.92,2449.19 ; 5554.92,2517.49 5554.92,2609.59 5554.92,2646.82 ; 5554.92,2713.82 5554.92,2803.52 ; 5554.92,2871.82 5554.92,2909.28 5734.48,2909.28 5734.49,2554.96 5734.49,2200.63 5734.49,1900.57 5734.49,1546.24 5555.27,1546.24 ; 5522.07,1584.66 5522.07,1650.66 5588.07,1650.66 5588.07,1584.66 5522.07,1584.66 ; 5522.07,1741.83 5588.07,1741.83 5588.07,1807.83 5522.07,1807.83 5522.07,1741.83 ; 5522.07,1938.99 5522.07,2004.99 5588.07,2004.99 5588.07,1938.99 5522.07,1938.99 ; 5522.07,2096.16 5588.07,2096.16 5588.07,2162.16 5522.07,2162.16 5522.07,2096.16 ; 5522.07,2293.32 5522.07,2359.32 5588.07,2359.32 5588.07,2293.32 5522.07,2293.32 ; 5522.07,2450.49 5588.07,2450.49 5588.07,2516.49 5522.07,2516.49 5522.07,2450.49 ; 5522.07,2647.65 5588.07,2647.65 5588.07,2713.65 5522.07,2713.65 5522.07,2647.65 ; 5522.07,2804.82 5522.07,2870.82 5588.07,2870.82 5588.07,2804.82 5522.07,2804.82
  text "Ground plane 2" at 5883.92,2719.42 h20

## Silkscreen, mask and mechanical layers (free items; w line width, h text height)
Top Overlay:
  lines w10: 5554.92,1583.83 5554.92,1557.1 5734.49,1557.1 5734.49,1678.07 5554.92,1678.07 5554.92,1651.35 ; 5554.92,1740.99 5554.92,1714.26 5734.49,1714.26 5734.49,1835.24 5554.92,1835.24 5554.92,1808.51 ; 5554.92,1938.16 5554.92,1911.43 5734.49,1911.43 5734.49,2032.4 5554.92,2032.4 5554.92,2005.68 ; 5554.92,2095.32 5554.92,2068.6 5734.49,2068.6 5734.49,2189.57 5554.92,2189.57 5554.92,2162.84 ; 5554.92,2292.49 5554.92,2265.76 5734.49,2265.76 5734.49,2386.73 5554.92,2386.73 5554.92,2360.01 ; 5554.92,2449.65 5554.92,2422.93 5734.49,2422.93 5734.49,2543.9 5554.92,2543.9 5554.92,2517.17 ; 5554.92,2646.82 5554.92,2620.09 5734.49,2620.09 5734.49,2741.07 5554.92,2741.07 5554.92,2714.34 ; 5554.92,2803.98 5554.92,2777.26 5734.49,2777.26 5734.49,2898.23 5554.92,2898.23 5554.92,2871.5
  text "WIRE 3 +" at 5277.66,2812 h30
  text "Cut out / Castellated / Via" at 5507.9,2806.83 h15
  text "WIRE 2 +" at 5277.66,2654.52 h30
  text "Cut out / Castellated / Via" at 5507.9,2649.66 h15
  text "WIRE 1 +" at 5277.66,2457.67 h30
  text "Cut out / Castellated / Via" at 5507.9,2452.5 h15
  text "WIRE 4 +" at 5277.66,2300.19 h30
  text "Cut out / Castellated / Via" at 5507.9,2295.33 h15
  text "April 2016" at 5248.97,2118.77 h20 r90
  text "WIRE 5 +" at 5277.66,2103.34 h30
  text "Cut out / Castellated / Via" at 5507.9,2098.16 h15
  text "WIRE 6 +" at 5277.66,1945.86 h30
  text "Cut out / Castellated / Via" at 5507.9,1941 h15
  text "WIRE 7 +" at 5277.66,1749.01 h30
  text "Cut out / Castellated / Via" at 5507.9,1743.83 h15
  text "PB2 Adapter board, Rev 0" at 5176.64,1601.39 h20 r90
  text "Darcy Barron, Amy Bender" at 5209.26,1600.03 h20 r90
  text "adamjohngilbert@gmail.com" at 5241.89,1595.95 h20 r90
  text "WIRE 8 +" at 5277.66,1591.53 h30
  text "Cut out / Castellated / Via" at 5507.9,1586.67 h15
  text "12" at 5046.03,1585.7 h20
  text "1" at 5119.44,1560.19 h20
Bottom Overlay:
  text "WIRE 3 -" at 5479.34,2829.87 h30
  text "WIRE 2 -" at 5479.34,2672.39 h30
  text "WIRE 1 -" at 5479.34,2475.54 h30
  text "McGill" at 5226.76,2467.02 h100
  text "WIRE 4 -" at 5479.34,2318.06 h30
  text "adamjohngilbert@gmail.com" at 5003.79,2135 h20 r90
  text "Darcy Barron, Amy Bender" at 4971.16,2130.92 h20 r90
  text "PB2 Adapter board, Rev 0" at 4938.54,2129.56 h20 r90
  text "WIRE 5 -" at 5479.34,2121.21 h30
  text "WIRE 6 -" at 5479.34,1963.73 h30
  text "April 2016" at 5039.12,1961.15 h20 r90
  text "WIRE 7 -" at 5479.34,1766.88 h30
  text "WIRE 8 -" at 5479.34,1609.4 h30
Top Solder:
  text "TopSolder" at 5883.38,2567.77 h20
Bottom Solder:
  text "BottomSolder" at 5881.84,2522.97 h20
Mechanical 1:
  lines w20: 5826.77,1321.95 4881.75,1321.95 4881.75,3133.07 5826.77,3133.07 5826.77,2896.85 5826.77,1558.68 5826.77,1322.46
  text "Vias connect Top layer to Mid 1" at 4979.2,3293.06 h20
  text "Vias connect Bop layer to Mid 2" at 4979.2,3259.58 h20
  text "Number 2 Mounting screws / 100mil / 150mil" at 5159.93,2995.43 h20
Mechanical 5:
  lines w10: 5554.92,1557.1 5554.92,1583.83 5554.92,1651.35 5554.92,1678.07 5734.49,1678.07 5734.49,1557.1 5554.92,1557.1 ; 5554.92,1714.26 5734.49,1714.26 5734.49,1835.24 5554.92,1835.24 5554.92,1808.51 5554.92,1740.99 5554.92,1714.26 ; 5554.92,1911.43 5734.49,1911.43 5734.49,2032.4 5554.92,2032.4 5554.92,2005.68 5554.92,1938.16 5554.92,1911.43 ; 5554.92,2068.6 5734.49,2068.6 5734.49,2189.57 5554.92,2189.57 5554.92,2162.84 5554.92,2095.32 5554.92,2068.6 ; 5554.92,2265.76 5734.49,2265.76 5734.49,2386.73 5554.92,2386.73 5554.92,2360.01 5554.92,2292.49 5554.92,2265.76 ; 5554.92,2422.93 5734.49,2422.93 5734.49,2543.9 5554.92,2543.9 5554.92,2517.17 5554.92,2449.65 5554.92,2422.93 ; 5554.92,2620.09 5734.49,2620.09 5734.49,2741.07 5554.92,2741.07 5554.92,2714.34 5554.92,2646.82 5554.92,2620.09 ; 5554.92,2777.26 5734.49,2777.26 5734.49,2898.23 5554.92,2898.23 5554.92,2871.5 5554.92,2803.98 5554.92,2777.26
  lines w20: 5826.77,1321.95 4881.75,1321.95 4881.75,3133.07 5826.77,3133.07 5826.77,2896.85 5826.77,1558.68 5826.77,1322.46
  text "Cut out / Castellated / Via" at 5502.9,2791.83 h15
  text "Cut out / Castellated / Via" at 5502.9,2634.66 h15
  text "Cut out / Castellated / Via" at 5502.9,2437.5 h15
  text "Cut out / Castellated / Via" at 5502.9,2280.33 h15
  text "Cut out / Castellated / Via" at 5502.9,2083.16 h15
  text "Cut out / Castellated / Via" at 5502.9,1926 h15
  text "Cut out / Castellated / Via" at 5502.9,1728.83 h15
  text "Cut out / Castellated / Via" at 5502.9,1571.67 h15

## Dimensions
4842.99,1328.03 to 4881.75,1321.95 on Mechanical 1
5371,1818 to 5368,1936 on Mechanical 1
4881.75,1321.95 to 4881.75,3133.07 on Mechanical 1
5738.35,3014.96 to 5738.35,1440.57 on Mechanical 1
5384,2798 to 5389,2878 on Mechanical 1
5402,2365 to 5407,2445 on Mechanical 1
5738.35,1440.57 to 5826.77,1321.95 on Mechanical 1
5738.35,1440.57 to 5826.77,1322.46 on Mechanical 1
5342.06,1440.57 to 5826.77,1558.68 on Mechanical 1
4881.75,3133.07 to 5826.77,3133.07 on Mechanical 1
5738.35,3014.96 to 5826.77,3133.07 on Mechanical 1